# Altium PCB DDS.PcbDoc
Units mil, origin at the board's own origin, x right, y up, seen from the top; angles counter-clockwise.
Board outline 2755.91 x 2755.91 mil, 2 copper layers (Top Layer, Bottom Layer); 108 components, 69 nets, 448 pads, 150 vias.
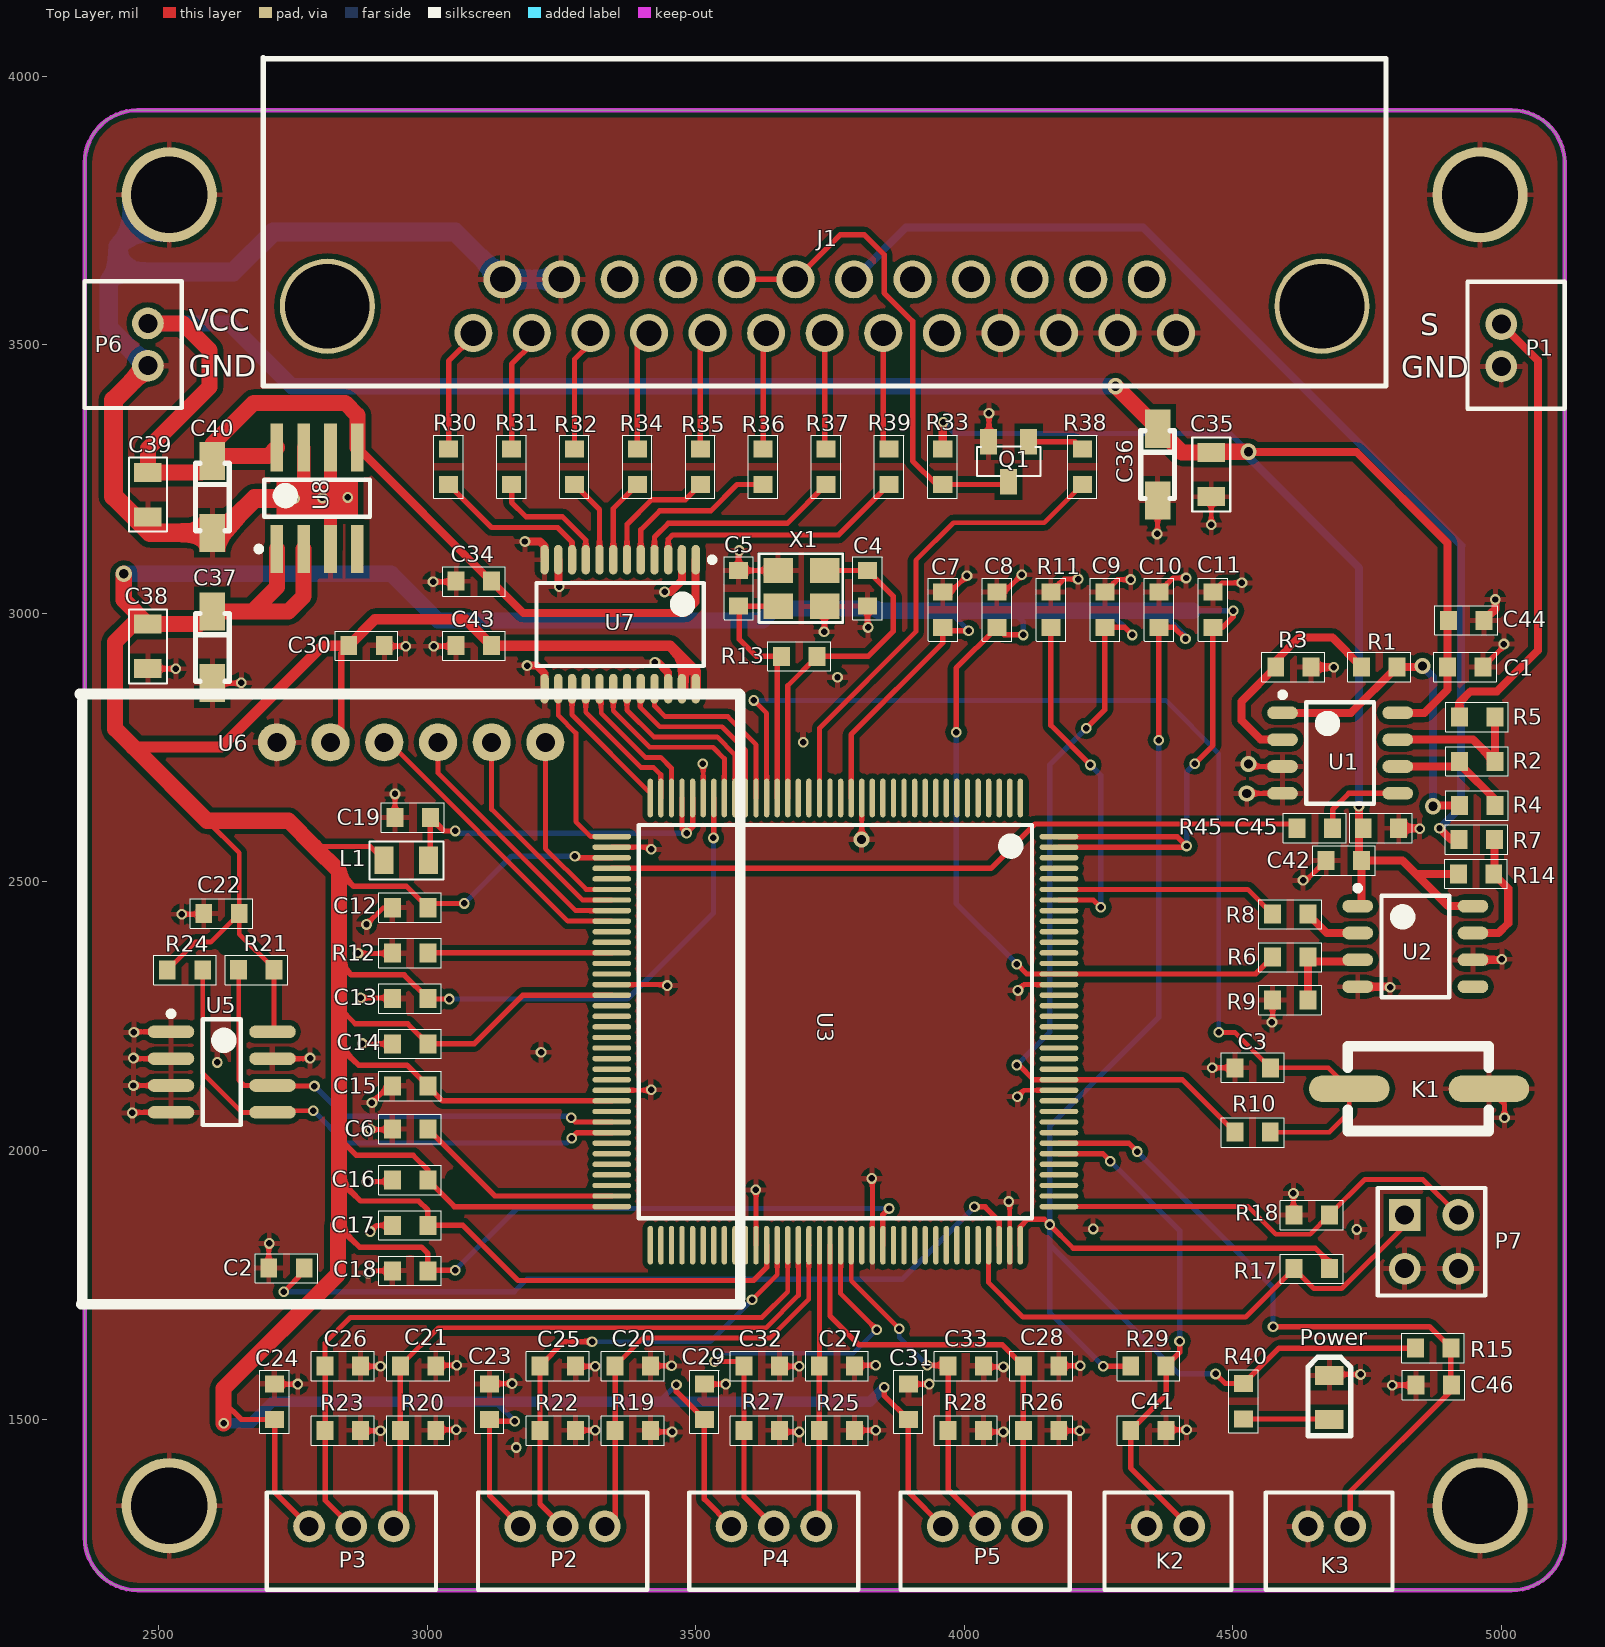
[diagram p0: Top Layer view]
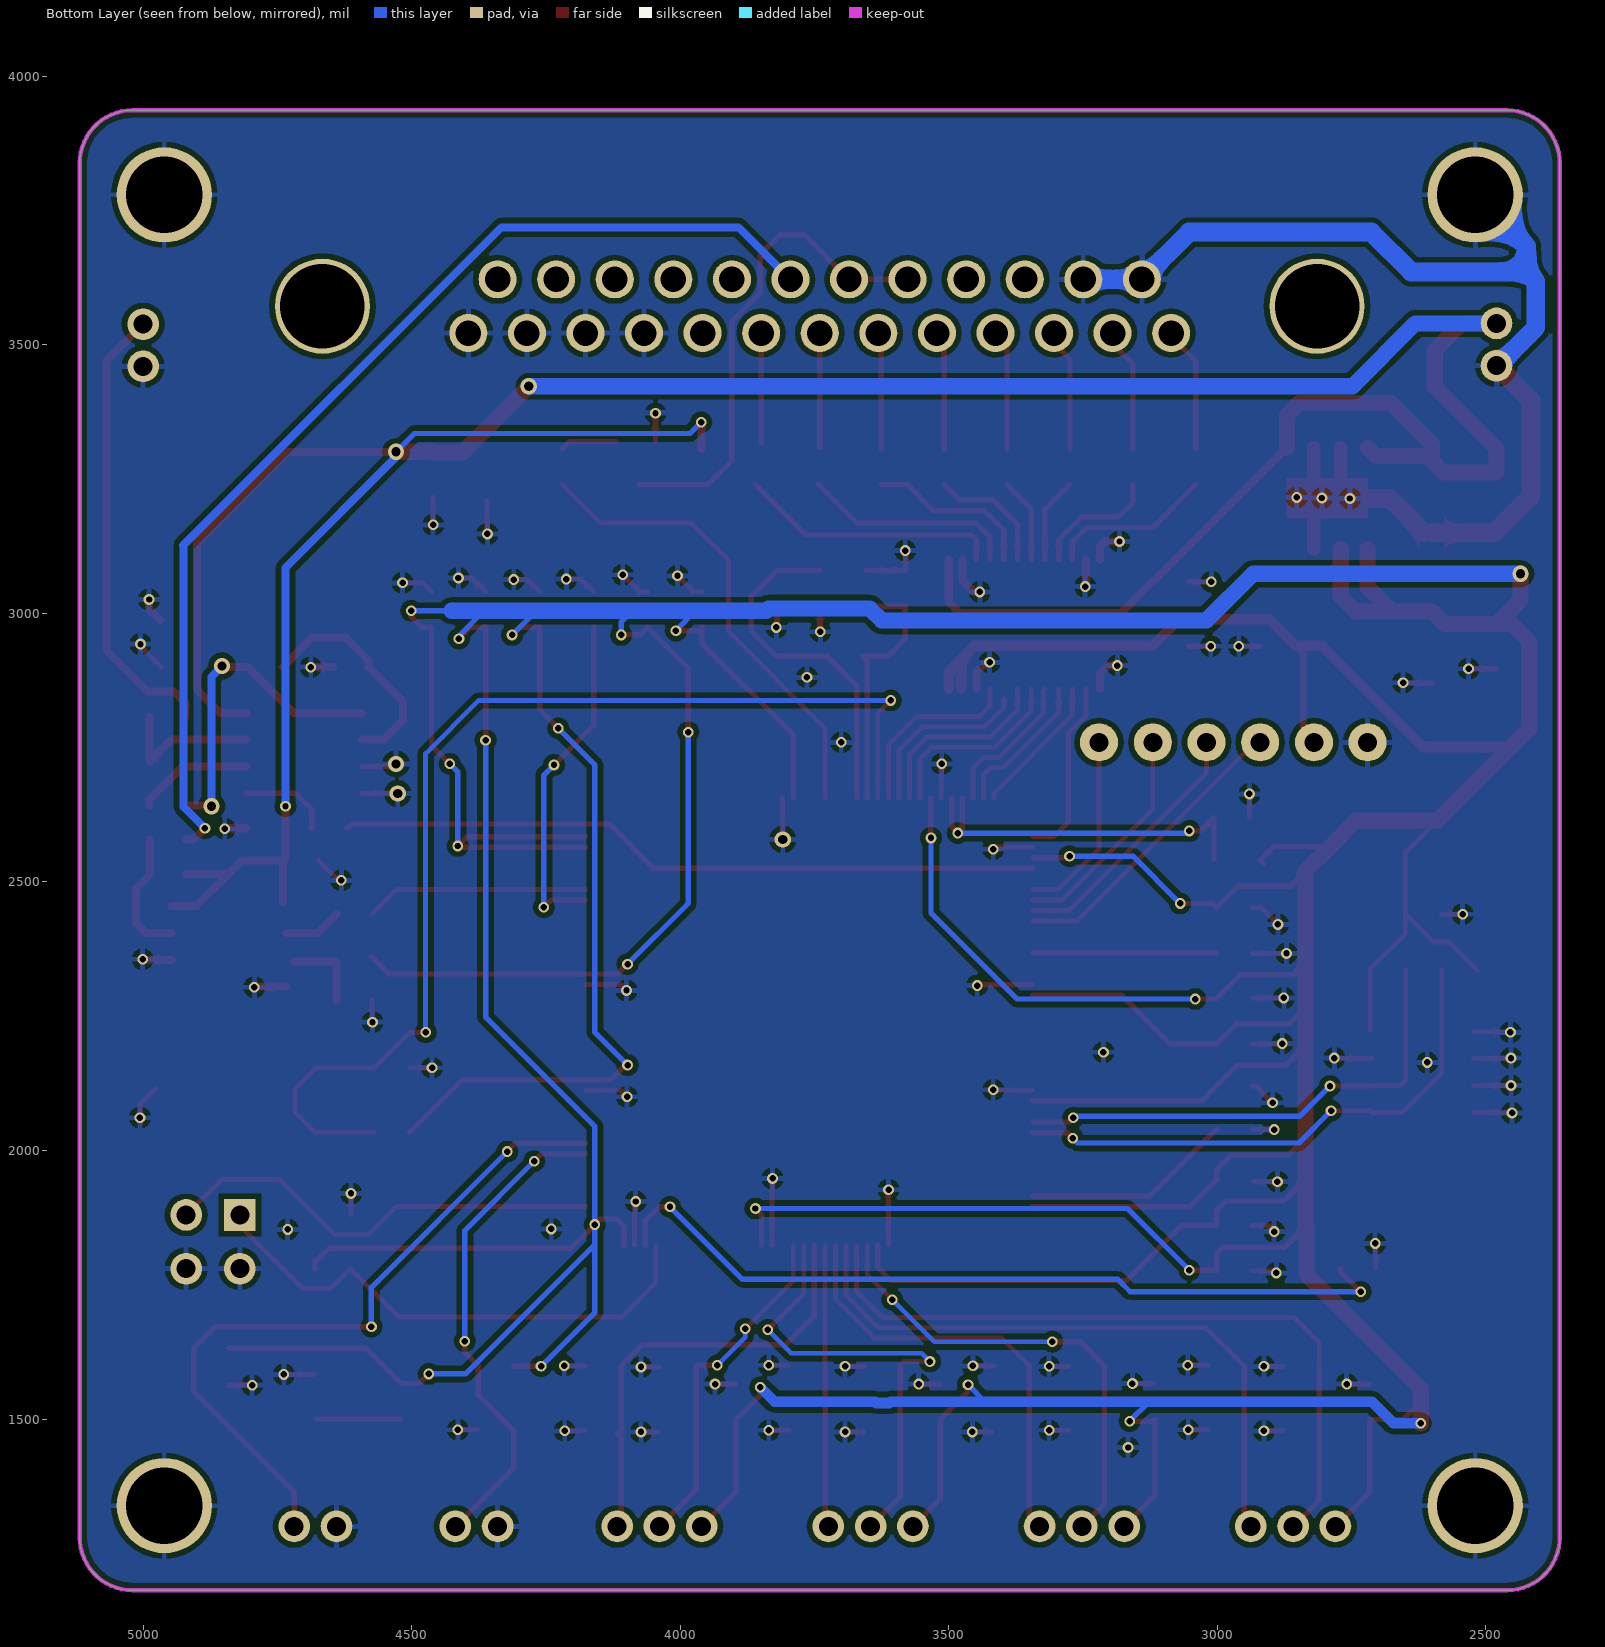
[diagram p1: Bottom Layer view, seen from below]

## Layer stack, top to bottom
Top Solder: solder mask 0.4, Solder Resist, Dk 3.5
Top Layer: signal copper 1.4
Dielectric1: dielectric 12.6, FR-4, Dk 4.8
Bottom Layer: signal copper 1.4
Bottom Solder: solder mask 0.4, Solder Resist, Dk 3.5

## Board outline
2362.2,1279.53 2362.2,3838.58 cw(c2460.63,3838.58) 2460.63,3937.01 5019.69,3937.01 cw(c5019.69,3838.58) 5118.11,3838.58 5118.11,1279.53 cw(c5019.69,1279.53) 5019.69,1181.1 2460.63,1181.1 cw(c2460.63,1279.53)

## Design rules (kind name [scope] priority, off if disabled: settings)
Clearance [All] p1: gap=8
ComponentClearance [All] p1: gap=0 collisioncheckmode=3 verticalgap=0 showdistances=FALSE
HoleSize [All] p1: absolutevalues=TRUE maxlimit=500 minlimit=1 maxpercent=80.000 minpercent=20.000
MinimumSolderMaskSliver [All] p1: minsoldermaskwidth=0
PolygonConnect [All] p1: connectstyle=Relief reliefconductorwidth=10 reliefentries=4 polygonreliefangle="90 Angle" airgapwidth=10
RoutingVias [All] p1: holewidth=12 width=20 viastyle="Through Hole" minholewidth=12 minwidth=20 maxholewidth=28 maxwidth=100
SilkToSilkClearance [All] p1: silktosilkclearance=0
SilkToSolderMaskClearance SilkscreenOverComponentPads [IsPad] p1: minsilkscreentomaskgap=0 clearancetoexposedcopper=TRUE
SolderMaskExpansion [All] p1: expansion=2
Width [All] p1: maxlimit=100 minlimit=8 preferedwidth=10
25 further rules are at their usual default settings.

## Classes and differential pairs
component class U_Power: C35 C36 C37 C38 C39 C40 LED1 P6 R40 U8
component class U_Module: C20 C21 C22 C23 C24 C25 C26 C27 C28 C29 C30 C31 C32 C33 C34 C41 C43 C46 J1 K2 K3 P2 P3 P4 P5 Q1 R15 R19 R20 R21 R22 R23 R24 R25 R26 R27 R28 R29 R30 R31 R32 R33 R34 R35 R36 R37 R38 R39 U5 U6 U7
component class U_MCU: C2 C3 C4 C5 C6 C7 C8 C9 C10 C11 C12 C13 C14 C15 C16 C17 C18 C19 K1 L1 P7 R10 R11 R12 R13 R17 R18 U3 X1
component class U_DDS: C1 C42 C44 C45 P1 R1 R2 R3 R4 R5 R6 R7 R8 R9 R14 R45 U1 U2

## Components (designator, comment, footprint, x,y, rotation, side; value= is the part's Value field where it differs from the comment)
C1 "Capacitor-0603" 0603 4900,2900 r0 top
C2 "Capacitor-0603" 0603 2771,1781 r180 top
C3 "Capacitor-0805" 0603 4504,2154 r0 top
C4 "Capacitor-0603" 0603 3820,3014.15 r90 top
C5 "Capacitor-0603" 0603 3580,3080 r270 top
C6 "Capacitor-0603" 0603 2935.15,2040 r0 top
C7 "Capacitor-0603" 0603 3960,3040 r270 top
C8 "Capacitor-0603" 0603 4060.6,3040 r270 top
C9 "Capacitor-0603" 0603 4261.8,3040 r270 top
C10 "Capacitor-0603" 0603 4362.4,3040 r270 top
C11 "Capacitor-0603" 0603 4463,3040 r270 top
C12 "Capacitor-0603" 0603 2935.15,2452 r0 top
C13 "Capacitor-0603" 0603 2935.15,2282.99 r0 top
C14 "Capacitor-0603" 0603 2935.15,2198.48 r0 top
C15 "Capacitor-0603" 0603 2935.15,2120 r0 top
C16 "Capacitor-0603" 0603 2935.15,1944.96 r0 top
C17 "Capacitor-0603" 0603 2935.15,1860.45 r0 top
C18 "Capacitor-0603" 0603 2935.15,1775.95 r0 top
C19 "Capacitor-0805" 0603 2940,2620 r0 top
C20 "Capacitor-0603" 0603 3416,1599 r180 top
C21 "Capacitor-0603" 0603 3016,1599 r180 top
C22 "Capacitor-0603" 0603 2584,2441 r0 top
C23 "Capacitor-0603" 0603 3116,1499 r90 top
C24 "Capacitor-0603" 0603 2716,1499 r90 top
C25 "Capacitor-0603" 0603 3276,1599 r180 top
C26 "Capacitor-0603" 0603 2876,1599 r180 top
C27 "Capacitor-0603" 0603 3796,1599 r180 top
C28 "Capacitor-0603" 0603 4176,1599 r180 top
C29 "Capacitor-0603" 0603 3516,1499 r90 top
C30 "Capacitor-0805" 0603 2920,2940 r180 top
C31 "Capacitor-0603" 0603 3896,1499 r90 top
C32 "Capacitor-0603" 0603 3656,1599 r180 top
C33 "Capacitor-0603" 0603 4036,1599 r180 top
C34 "Capacitor-0603" 0603 3120,3060 r180 top
C35 "Capacitor-0805" 0805 4460,3300 r270 top
C36 "电解电容" 钽电容1206（A3216） 4360,3340 r270 top
C37 "电解电容" 钽电容1206（A3216） 2600,3000 r270 top
C38 "Capacitor-0805" 0805 2480,2980 r270 top
C39 "Capacitor-0805" 0805 2480,3180 r90 top
C40 "电解电容" 钽电容1206（A3216） 2600,3280 r270 top
C41 "Capacitor-0603" 0603 4376,1479 r180 top
C42 "Capacitor-0603" 0603 4740,2540 r180 top
C43 "Capacitor-0603" 0603 3120,2940 r180 top
C44 "Capacitor-0603" 0603 4902,2987 r0 top
C45 "Capacitor-0603" 0603 4743,2600 r0 top
C46 "Capacitor-0603" 0603 4841,1563 r0 top
J1 "DB25" DB25ĸͷ 3739.16,3522.05 r180 top
K1 "按键" 贴片按键 4977,2115 r180 top
K2 "按键" 2MM接线端子 4340,1300 r0 top
K3 "按键" 2MM接线端子 4640,1300 r0 top
L1 "Inductor" 0805 2920,2540 r0 top
P1 "端子" 2MM接线端子 5000,3460 r90 top
P2 "端子3" 3MM接线端子 3173.33,1300 r0 top
P3 "端子3" 3MM接线端子 2780,1300 r0 top
P4 "端子3" 3MM接线端子 3566.67,1300 r0 top
P5 "端子3" 3MM接线端子 3960,1300 r0 top
P6 "端子" 2MM接线端子 2480,3540 r270 top
P7 "Header 2X2" HDR2X2 4820,1880 r270 top
Power "LED" LED-0805 4680,1540 r90 top (schematic designator LED1)
Q1 "BC847" BC847B 4120,3320 r270 top
R1 "Resistor-0603" 0603 4805.85,2900.56 r180 top
R2 "Resistor-0603" 0603 4922,2724.5 r0 top
R3 "Resistor-0603" 0603 4580,2900 r0 top
R4 "Resistor-0603" 0603 4922,2642 r0 top
R5 "Resistor-0603" 0603 4922,2807 r0 top
R6 "Resistor-0805" 0603 4640,2360 r180 top
R7 "Resistor-0603" 0603 4921,2579 r0 top
R8 "Resistor-0603" 0603 4640,2440 r180 top
R9 "Resistor-0805" 0603 4574.15,2280 r0 top
R10 "Resistor-0805" 0603 4569.85,2034 r180 top
R11 "Resistor-0805" 0603 4161.2,3040 r270 top
R12 "Resistor-0805" 0603 2935.15,2367.49 r0 top
R13 "Resistor-0603" 0603 3660,2920 r0 top
R14 "Resistor-0603" 0603 4920,2515 r0 top
R15 "Resistor-0603" 0603 4840,1632 r0 top
R17 "Resistor-0805" 0603 4680,1780 r180 top
R18 "Resistor-0805" 0603 4680,1880 r180 top
R19 "Resistor-0603" 0603 3416,1479 r180 top
R20 "Resistor-0603" 0603 3016,1479 r180 top
R21 "Resistor-0603" 0603 2715,2336.56 r180 top
R22 "Resistor-0603" 0603 3276,1479 r180 top
R23 "Resistor-0603" 0603 2876,1479 r180 top
R24 "Resistor-0603" 0603 2516,2336 r0 top
R25 "Resistor-0603" 0603 3796,1479 r180 top
R26 "Resistor-0603" 0603 4176,1479 r180 top
R27 "Resistor-0603" 0603 3656,1479 r180 top
R28 "Resistor-0603" 0603 4036,1479 r180 top
R29 "Resistor-0603" 0603 4376,1599 r180 top
R30 "Resistor-0603" 0603 3040,3240 r90 top
R31 "Resistor-0603" 0603 3157.14,3240 r90 top
R32 "Resistor-0603" 0603 3274.29,3240 r90 top
R33 "Resistor-0603" 0603 3960,3240 r90 top
R34 "Resistor-0603" 0603 3391.43,3240 r90 top
R35 "Resistor-0603" 0603 3508.57,3240 r90 top
R36 "Resistor-0603" 0603 3625.71,3240 r90 top
R37 "Resistor-0603" 0603 3742.86,3240 r90 top
R38 "Resistor-0603" 0603 4220,3240 r90 top
R39 "Resistor-0603" 0603 3860,3240 r90 top
R40 "Resistor-0603" 0603 4520,1500 r90 top
R45 "Resistor-0603" 0603 4620,2600 r0 top
U1 "AD8622" LM358-D 4700,2740 r0 top
U2 "MAX903" LM358-D 4840,2380 r0 top
U3 "STM32F407ZGT6" "Stm32f407ZET6 - duplicate" 3760,2240 r270 top
U5 "AT24C02" AT24C02 2524,2221 r0 top
U6 "OLED" OLED 2720,2760 r0 top
U7 "74LVC4245" 74LVC4245-PW 3500,3100 r270 top
U8 "LT1963" LT1963 2720,3120 r90 top
X1 "3225无源晶振" 3225无源晶振 3740,3080 r180 top

## Footprints (in the part's own frame and the unit in brackets; to place one, negate y for a bottom-side part, rotate by r counter-clockwise, add the part's x,y. Pads: shape width x height; smd on the part's side, far side on the other; paste and mask are expansions set on the pad)
2MM接线端子 [mm]
  round 1.5 hole 0.9: 1(0,0) 2(2,0)
  silkscreen extent -2,-3 4,1.6
3MM接线端子 [mm]
  round 1.5 hole 0.9: 1(0,0) 2(2,0) 3(4,0)
  silkscreen extent -2,-3 6,1.6
74LVC4245-PW [mm]
  oval 1.4x0.4 smd: 1(0,0) 2(0,-0.65) 3(0,-1.3) 4(0,-1.95) 5(0,-2.6) 6(0,-3.25) 7(0,-3.9) 8(0,-4.55) 9(0,-5.2) 10(0,-5.85) 11(0,-6.5) 12(0,-7.15) 13(6.1,-7.15) 14(6.1,-6.5) 15(6.1,-5.85) 16(6.1,-5.2) 17(6.1,-4.55) 18(6.1,-3.9) 19(6.1,-3.25) 20(6.1,-2.6) 21(6.1,-1.95) 22(6.1,-1.3) 23(6.1,-0.65) 24(6.1,0)
  silkscreen extent -0.12,-7.52 5.03,0.9, body extent 0.78,-7.53 5.28,0.37, height 1.25
0603 [mm] "0603"
  rect 0.8x0.9 smd: 1(0,0) 2(1.676,0)
  silkscreen extent -0.65,-0.69 2.32,0.7, body extent 0.1,-0.4 1.7,0.4, height 0.5
0805 [mm] "Chip Resistor, 2-Leads, Body 2.0x1.2mm, IPC Medium Density"
  rect 0.9x1.3 smd: 1(0,0) 2(2.1,0)
  silkscreen extent -0.7,-0.9 2.8,0.9, body extent 0.05,-0.6 2.05,0.6, height 0.5
3225无源晶振 [mm]
  rect 1.4x1.2 smd: 1(0,0) 2(2.2,0) 3(2.2,1.7) 4(0,1.7)
  silkscreen extent -0.86,-0.79 3.1,2.46
AT24C02 [mm]
  oval 2.2x0.6 smd: 1(-0.025,0) 2(-0.025,-1.27) 3(-0.025,-2.54) 4(-0.025,-3.81) 5(4.775,-3.81) 6(4.775,-2.54) 7(4.775,-1.27) 8(4.775,0)
  silkscreen extent -0.15,-4.41 3.27,0.97, body extent 0.38,-4.41 4.37,0.6, height 1.75
BC847B [mm] "SOT23, 3-Leads, Body 2.90x2.45mm, Pitch 0.95mm, IPC Medium Density"
  rect 1.2x0.8 smd: 1(0,-1.9) 2(0,0) 3(1.9,-0.95)
  silkscreen extent 0.24,-2.45 1.63,0.55, body extent 0.25,-2.45 1.65,0.55, height 1.1
DB25ĸͷ [mm]
  round 4.5 hole 4: 0(-23.545,-1.27) 0(23.495,-1.27)
  round 1.8 hole 1.2: 1(16.595,0) 2(13.825,0) 3(11.055,0) 4(8.285,0) 5(5.515,0) 6(2.745,0) 7(-0.025,0) 8(-2.795,0) 9(-5.565,0) 10(-8.335,0) 11(-11.105,0) 12(-13.875,0) 13(-16.645,0) 14(15.21,-2.54) 15(12.44,-2.54) 16(9.67,-2.54) 17(6.9,-2.54) 18(4.13,-2.54) 19(1.36,-2.54) 20(-1.41,-2.54) 21(-4.18,-2.54) 22(-6.95,-2.54) 23(-9.72,-2.54) 24(-12.49,-2.54) 25(-15.26,-2.54)
  silkscreen extent -26.58,-13.02 26.52,2.5
HDR2X2 [mm] "Connector; Header; 2x2 Position"
  rect 1.5x1.5 hole 0.9: 1(0,0)
  round 1.5 hole 0.9: 2(0,2.54) 3(2.54,0) 4(2.54,2.54)
  silkscreen extent -1.27,-1.27 3.81,3.81
LED-0805 [mm]
  rect 0.9x1.35 smd: 1(-1.05,0) 2(1.05,0)
  silkscreen extent -1.8,-1.02 1.91,1.02
LM358-D [mm] "SOIC, 8-Leads, Body 4.90x3.90mm, Pitch 1.27mm, IPC Medium Density"
  oval 1.45x0.6 smd: 1(-2.725,1.905) 2(-2.725,0.635) 3(-2.725,-0.635) 4(-2.725,-1.905) 5(2.725,-1.905) 6(2.725,-0.635) 7(2.725,0.635) 8(2.725,1.905)
  silkscreen extent -2.85,-2.4 1.6,2.88, body extent -2,-2.4 2,2.4, height 1.75
LT1963 [mm]
  rect 2.25x0.6 smd: 1(0,0) 2(0,-1.27) 3(0,-2.54) 4(0,-3.81) 5(4.8,-3.81) 6(4.8,-2.54) 7(4.8,-1.27) 8(4.8,0)
  silkscreen extent -0.12,-4.41 3.27,0.97, body extent 0.41,-4.41 4.4,0.6, height 1.75
OLED [mm]
  round 1.8 hole 0.9: 1(0,0) 2(2.54,0) 3(5.08,0) 4(7.62,0) 5(10.16,0) 6(12.7,0)
  round 0 smd: 7(-6.172,-23.495) 8(18.872,-23.495)
  silkscreen extent -9.32,-26.57 21.95,2.29
"Stm32f407ZET6 - duplicate" [mm] "TSQFP, 144-Leads, Body 22.2x22.2mm (max), Pitch 0.50mm, IPC Medium Density"
  oval 1.83x0.254 smd: 1(-10.575,8.75) 2(-10.575,8.25) 3(-10.575,7.75) 4(-10.575,7.25) 5(-10.575,6.75) 6(-10.575,6.25) 7(-10.575,5.75) 8(-10.575,5.25) 9(-10.575,4.75) 10(-10.575,4.25) 11(-10.575,3.75) 12(-10.575,3.25) 13(-10.575,2.75) 14(-10.575,2.25) 15(-10.575,1.75) 16(-10.575,1.25) 17(-10.575,0.75) 18(-10.575,0.25) 19(-10.575,-0.25) 20(-10.575,-0.75) 21(-10.575,-1.25) 22(-10.575,-1.75) 23(-10.575,-2.25) 24(-10.575,-2.75) 25(-10.575,-3.25) 26(-10.575,-3.75) 27(-10.575,-4.25) 28(-10.575,-4.75) 29(-10.575,-5.25) 30(-10.575,-5.75) 31(-10.575,-6.25) 32(-10.575,-6.75) 33(-10.575,-7.25) 34(-10.575,-7.75) 35(-10.575,-8.25) 36(-10.575,-8.75) 73(10.575,-8.75) 74(10.575,-8.25) 75(10.575,-7.75) 76(10.575,-7.25) 77(10.575,-6.75) 78(10.575,-6.25) 79(10.575,-5.75) 80(10.575,-5.25) 81(10.575,-4.75) 82(10.575,-4.25) 83(10.575,-3.75) 84(10.575,-3.25) 85(10.575,-2.75) 86(10.575,-2.25) 87(10.575,-1.75) 88(10.575,-1.25) 89(10.575,-0.75) 90(10.575,-0.25) 91(10.575,0.25) 92(10.575,0.75) 93(10.575,1.25) 94(10.575,1.75) 95(10.575,2.25) 96(10.575,2.75) 97(10.575,3.25) 98(10.575,3.75) 99(10.575,4.25) 100(10.575,4.75) 101(10.575,5.25) 102(10.575,5.75) 103(10.575,6.25) 104(10.575,6.75) 105(10.575,7.25) 106(10.575,7.75) 107(10.575,8.25) 108(10.575,8.75)
  oval 0.254x1.83 smd: 37(-8.75,-10.575) 38(-8.25,-10.575) 39(-7.75,-10.575) 40(-7.25,-10.575) 41(-6.75,-10.575) 42(-6.25,-10.575) 43(-5.75,-10.575) 44(-5.25,-10.575) 45(-4.75,-10.575) 46(-4.25,-10.575) 47(-3.75,-10.575) 48(-3.25,-10.575) 49(-2.75,-10.575) 50(-2.25,-10.575) 51(-1.75,-10.575) 52(-1.25,-10.575) 53(-0.75,-10.575) 54(-0.25,-10.575) 55(0.25,-10.575) 56(0.75,-10.575) 57(1.25,-10.575) 58(1.75,-10.575) 59(2.25,-10.575) 60(2.75,-10.575) 61(3.25,-10.575) 62(3.75,-10.575) 63(4.25,-10.575) 64(4.75,-10.575) 65(5.25,-10.575) 66(5.75,-10.575) 67(6.25,-10.575) 68(6.75,-10.575) 69(7.25,-10.575) 70(7.75,-10.575) 71(8.25,-10.575) 72(8.75,-10.575) 109(8.75,10.575) 110(8.25,10.575) 111(7.75,10.575) 112(7.25,10.575) 113(6.75,10.575) 114(6.25,10.575) 115(5.75,10.575) 116(5.25,10.575) 117(4.75,10.575) 118(4.25,10.575) 119(3.75,10.575) 120(3.25,10.575) 121(2.75,10.575) 122(2.25,10.575) 123(1.75,10.575) 124(1.25,10.575) 125(0.75,10.575) 126(0.25,10.575) 127(-0.25,10.575) 128(-0.75,10.575) 129(-1.25,10.575) 130(-1.75,10.575) 131(-2.25,10.575) 132(-2.75,10.575) 133(-3.25,10.575) 134(-3.75,10.575) 135(-4.25,10.575) 136(-4.75,10.575) 137(-5.25,10.575) 138(-5.75,10.575) 139(-6.25,10.575) 140(-6.75,10.575) 141(-7.25,10.575) 142(-7.75,10.575) 143(-8.25,10.575) 144(-8.75,10.575)
  silkscreen extent -9.3,-9.3 9.3,9.3, body extent -10,-10 10,10, height 0.16
贴片按键 [mil]
  oval 150x50 smd: 1(0,0) 2(260,0)
  silkscreen extent 0,-79 263,79
钽电容1206（A3216） [mm]
  rect 1.8x1.2 smd: 1(3.3,0) 2(-0.1,0)
  silkscreen extent 0,-0.8 3.2,0.8

## Part data
C3 C30: library part Capacitor-0
C19 C35 C38 C39: library part Capacitor
L1: library part Ind
P7: "Header, 2-Pin, Dual row"
R6 R9 R10 R11 R12 R17 R18: library part Resistor-0
U3: library part STM32F407ZET6
U6: library part O
U8: library part L

## Free pads (board coordinates)
  round 177.17 hole 141.73: 0(2519.68,1338.58) 0(2519.68,3779.53) 0(4960.63,1338.58) 0(4960.63,3779.53)

## Via types
v1: diameter 20, hole 12, Top Layer to Bottom Layer, 142 vias
v2: diameter 30, hole 17, Top Layer to Bottom Layer, 8 vias

## Nets (pads, with @x,y where several pads share a name; then routed paths per layer and width w, separated by ;. In a path a pad name is that pad's centre, name@x,y a point inside that pad or via, vN(x,y) a via of type N, cw(c..) or ccw(c..) an arc to the next point about the centre after c; other vN are vias at no path point)
A1: C21.2 P3.3 R20.2 U3.87 | length 1175.4
  Top Layer w9: C21.2 3021,1670 3631,1670 3691.1,1730.1 U3.87
  Top Layer w10: P3.3@2950,1312.52 R20.2 C21.2
A2: C20.2 P2.3 R19.2 U3.88 | length 819.8
  Top Layer w9: C20.2 3402,1651 3638.87,1651 3710.6,1722.73 3710.6,1823.48 U3.88
  Top Layer w10: P2.3 3350,1319.19 R19.2 C20.2
A3: C27.2 P4.3 R25.2 U3.89 | length 525.6
  Top Layer w9: C27.2@3730.47,1599.47 U3.89
  Top Layer w10: P4.3 3730,1305.85 R25.2 C27.2
A4: C28.2 P5.3 R26.2 U3.90 | length 832.2
  Top Layer w10: U3.90 3750.16,1691.84 3804,1638 4071,1638 C28.2 R26.2 ; P5.3@4110,1307.48 R26.2 ; R26.2@4117.48,1471.52 R26.2
B1: C26.2 P3.2 R23.2 U3.86 | length 1349.4
  Top Layer w9: C26.2 2810,1642 2857,1689 3623.13,1689 3671.42,1737.29 U3.86
  Top Layer w10: C26.2 R23.2 2810,1348.74 P3.2
B2: C25.2 P2.2 R22.2 U3.85 | length 883.4
  Top Layer w9: v1(3605,1722) 3651.73,1768.73 U3.85
  Top Layer w10: P2.2 3210,1342.07 R22.2 C25.2 3255,1644 v1(3307,1644)
  Bottom Layer w9: v1(3307,1644) 3527,1644 v1(3605,1722)
B3: C32.2 P4.2 R27.2 U3.91 | length 882.9
  Top Layer w9: U3.91 3769.84,1733.16 v1(3837,1666)
  Top Layer w10: v1(3535,1607) C32.2@3583,1607 ; C32.2@3590,1600 C32.2 R27.2 3590,1355.41 P4.2
  Bottom Layer w9: v1(3535,1607) 3550.5,1622.5 3793.5,1622.5 v1(3837,1666)
B4: C33.2 P5.2 R28.2 U3.92 | length 649.1
  Top Layer w9: U3.92 3789.53,1757.47 v1(3879,1668)
  Top Layer w10: v1(3931,1600) 3969,1600 C33.2 R28.2 3970,1368.74 P5.2
  Bottom Layer w9: v1(3879,1668) 3879,1652 v1(3931,1600)
BOOT0: R11.2 U3.138 | length 642.6
  Top Layer w9: U3.138 4240.62,2466.38 v1(4254,2453)
  Top Layer w10: R11.2 4161.2,2791.8 v1(4235,2718)
  Bottom Layer w10: v1(4235,2718) 4254,2699 v1(4254,2453)
BOOT1: R12.2 U3.48 | length 342.7
  Top Layer w10: R12.2 3001.61,2367.95 U3.48
DDS: R2.2 R5.2 U1.7 | length 280
  Top Layer w15: U1.7 4947.5,2765 R2.2 R5.2
GND: C1.2 C2.2 C3.1 C4.1 C5.1 C6.1 C7.1 C8.1 C9.1 C10.1 C11.1 C12.1 C13.1 C14.1 C15.1 C16.1 C17.1 C18.1 C19.1 C20.1 C21.1 C22.1 C23.2 C24.2 C25.1 C26.1 C27.1 C28.1 C29.2 C30.1 C31.2 C32.1 C33.1 C34.2 C35.2 C36.1 C37.1 C38.2 C39.1 C40.1 C41.1 C42.2 C43.2 C44.2 C45.2 C46.1 J1.10 J1.11 J1.12 J1.13 J1.14 J1.15 K1.1 K2.1 K3.1 P1.1 P6.2 P7.3 P7.4 pad.0 Power.2 Q1.1 R3.2 R9.1 R11.1 R12.1 R18.2 R19.1 R20.1 R22.1 R23.1 R25.1 R26.1 R27.1 R28.1 U1.3 U1.4 U2.4 U2.6 U3.16 U3.31 U3.38 U3.51 U3.61 U3.83 U3.94 U3.107 U3.120 U3.130 U5.1 U5.2 U5.3 U5.4 U5.7 U6.1 U7.2 U7.11 U7.12 U7.13 U7.22 U8.3 U8.6 U8.7 X1.2 X1.4 | length 6906.7
  Top Layer w9: v1@2452,2071 U5.4 ; v1(2453,2121) U5.3 ; v1@2454,2171 U5.2 ; v1@2455,2221 U5.1 ; v1(2543,2440) C22.1@2583,2440 ; C2.2 2705,1826 v1(2706,1827) ; U5.7 v1@2781,2171 ; C24.2 v1(2759,1565) ; v1(2871,2367) 2934.66,2367 R12.1 ; v1(2876,2284) C13.1@2934.14,2284 ; R23.1@2877,1478 v1(2913,1478) ; C26.1@2877,1598 v1(2913,1598) ; v1@2879.52,2198.48 C14.1 ; v1(2887,2421) 2918,2452 C12.1 ; v1(2888,1942) C16.1@2932.19,1942 ; v1(2890,1772) 2893.95,1775.95 C18.1 ; v1(2894,1849) 2905.45,1860.45 C17.1 ; v1(2894,2039) 2934.15,2039 C6.1 ; v1(2897,2089) 2928,2120 C15.1 ; C19.1 v1(2940,2664) ; R20.1@3017,1480 v1(3054,1480) ; C21.1@3017,1600 v1(3055,1600) ; C23.2@3117,1566 v1(3158,1566) ; R22.1 v1(3313,1479) ; C25.1@3277,1598 v1(3313,1598) ; U3.61 v1@3416.05,2112.05 ; U3.51 v1@3445.1,2308.9 ; U3.38 3413.2,2564.8 v1(3417,2561) ; C20.1 v1(3455,1599) ; R19.1@3419,1476 v1(3456,1476) ; v1(3513,2720) 3513.94,2719.06 U3.31 ; C29.2 v1(3556,1565) ; U3.83 v1@3612.36,1927 ; C32.1@3657,1598 v1(3693,1598) ; R27.1@3659,1476 v1(3693,1476) ; R25.1 v1(3835,1479) ; C27.1@3797,1600 v1(3835,1600) ; v2(3809,2579) 3809.21,2579.21 U3.16 ; U3.94 v1@3828.9,1948 ; C31.2 v1(3935,1565) ; C7.1 3975,3040 v1(4005,3070) ; C33.1@4038,1597 v1(4073,1597) ; R28.1@4039,1476 v1(4073,1476) ; C8.1 4075,3040 v1(4107,3072) ; v1(4083,1905) 4084.8,1903.2 U3.107 ; v1(4099,2100) 4111.05,2112.05 U3.120 ; v1(4100,2298) 4110.9,2308.9 U3.130 ; R11.1 4185.2,3064 v1(4212,3064) ; C28.1 v1(4216,1599) ; R26.1@4177,1478 v1(4215,1478) ; C9.1 4284.8,3063 v1(4310,3063) ; v1(4359,3148) 4360,3149 C36.1 ; C10.1 4388.4,3066 v1(4413,3066) ; C41.1@4377,1480 v1(4414,1480) ; v1(4460,3165) C35.2 ; v1(4462,2154) C3.1 ; C11.1 4480,3057 v1(4517,3057) ; v2(4526,2665) U1.4 ; v2@4534,2715 U1.3 ; v1@4574.15,2240.15 R9.1 ; R18.2@4613,1881 v1(4613,1920) ; v1(4631,2503) 4637,2503 C42.2 ; Power.2@4681.66,1583 v1(4738,1583) ; C1.2 5005,2939 v1(5005,2943) ; K1.1 5006,2086 v1(5006,2061)
  Top Layer w10: C38.2@2480.32,2897 v1(2532,2897) ; C37.1 v1@2653.08,2870.08 ; C30.1@2921,2939 v1(2960,2939) ; v1(3011,3059) C34.2@3053,3059 ; v1(3012,2939) C43.2@3053,2939 ; v1@3244.09,3051.91 v1(3246,3050) ; v1@3580,3116 C5.1 X1.2 ; v1(3739,2966) 3740,2967 X1.4 ; C4.1 3820,2975 v1(3821,2974) ; Q1.1@4046,3320.8 v1(4046,3373) ; K2.1@4340,1276 K2.1 ; v1(4797,1563) C46.1
  Top Layer w15: v1(3182,3134) 3210,3134 3218.5,3125.5 U7.12 ; v1(3186,2903) 3204,2903 3218.5,2888.5 U7.13 ; v1@3244.09,3051.91 U7.11 ; v1(3424,2909) 3429.64,2909 3448.6,2890.04 3448.6,2860.06 U7.22 ; v1(3442,3040) 3453,3040 3474.41,3061.41 U7.2 ; R3.2 v1(4688,2900) ; U2.4 v1@4792,2305 ; C45.2 4847,2600 v1(4848,2599) ; U2.6 v1@5000,2355 ; C44.2 4989,3008 v1(4989,3026)
  Top Layer w25: C40.1 C40.1@2615.08,3150.08 ; U8.7 2770,3228 2781,3217 ; U8.3 2820,3219 ; U8.6 2820,3219 ; 2821,3218 2820,3219
  Top Layer w35: P6.2 2416,3397.26 2416,3218 2483.92,3150.08 C40.1 ; C40.1@2615.08,3150.08 2679,3214 v1(2753,3214)
  Bottom Layer w35: P6.2 2478.09,3461.26 2407,3532.35 2407,3619 2424,3636 ; pad.0@2519.68,3779.53 2424,3683.84 2424,3636 ; J1.15 J1.14 3052.4,3710 2713,3710 2639,3636 2424,3636
  other v1: 3166,1447 4731,1853 4240,1854 3612,1927 3828,1948 2451,2070 3417,2113 2609,2164 2453,2172 2782,2172 3212,2183 2879,2199 2454,2220 4573,2239 4793,2304 3447,2307 5001,2356 3700,2760 2654,2871 3764,2881 3581,3117 2805,3215 2852,3216
  other v2: 4529,2720
NetC2_1: C2.1 U3.106 | length 1513.3
  Top Layer w10: v1(2733,1737) 2771,1775 C2.1 ; v1(4019,1895) 4039,1895 4065.12,1868.88 U3.106
  Bottom Layer w10: v1(2733,1737) 3162,1737 3185,1760 3884,1760 v1(4019,1895)
NetC4_2: C4.2 R13.2 U3.23 X1.1 | length 660.5
  Top Layer w10: U3.23 3671.42,2865.42 R13.2 3821,2920 3868,2967 3868,3031.85 3819.85,3080 X1.1
NetC5_2: C5.2 R13.1 U3.24 X1.3 | length 492.9
  Top Layer w10: U3.24 3651.73,2911.73 R13.1 3613,2920 3580.93,2952.07 3580.93,3013.07 X1.3
NetC6_2: C6.2 U3.71 | length 394.2
  Top Layer w10: C6.2 3125.95,1915.2 U3.71
NetC41_2: C41.2 K2.2 R29.1 U3.114 | length 917.6
  Top Layer w10: U3.114 4258.06,1993.94 v1(4272,1980) ; v1(4401,1645) 4401,1624 R29.1 4376,1545 C41.2 4310,1408.74 K2.2
  Bottom Layer w10: v1(4272,1980) 4401,1851 v1(4401,1645)
NetC46_2: C46.2 K3.2 R15.2 U3.115 | length 1340.9
  Top Layer w10: U3.115 4306.38,2013.62 v1(4322,1998) ; v1(4575,1672) 4866,1672 R15.2 4906,1564 C46.2 4907,1553 4718.74,1364.74 K3.2
  Bottom Layer w10: v1(4322,1998) 4575,1745 v1(4575,1672)
NetJ1_1: J1.1 R30.2 | length 235
  Top Layer w10: R30.2 3040,3470 3085.83,3515.83 J1.1
NetJ1_2: J1.2 R31.2 | length 231.7
  Top Layer w10: R31.2 3157.14,3464.14 3194.88,3501.88 J1.2
NetJ1_3: J1.3 R32.2 | length 228.3
  Top Layer w10: R32.2 3274.29,3473.29 3303.94,3502.94 J1.3
NetJ1_4: J1.4 R34.2 | length 225
  Top Layer w10: R34.2 3391.43,3500.48 J1.4
NetJ1_5: J1.5 R35.2 | length 221.6
  Top Layer w10: R35.2 3508.57,3508.57 J1.5
NetJ1_6: J1.6 R36.2 | length 218.3
  Top Layer w10: R36.2 3625.71,3496.71 3631.1,3502.1 J1.6
NetJ1_7: J1.7 R37.2 | length 213.3
  Top Layer w10: R37.2@3740.16,3308.7 J1.7
NetJ1_8: J1.8 R39.2 | length 205.3
  Top Layer w10: R39.2@3849.21,3316.79 J1.8
NetJ1_18: J1.18 J1.19 Q1.3 R33.1 | length 921.7
  Top Layer w10: J1.18 J1.19 3768.58,3705 3814,3705 3851,3668 3851,3597 3904,3544 3904,3284 3948,3240 R33.1 Q1.3@4077.4,3240
NetJ1_20: J1.20 R7.1 | length 2003.7
  Top Layer w15: v1(4885,2600) 4906,2579 R7.1
  Bottom Layer w15: J1.20 3891.64,3719 4333,3719 4925.5,3126.5 ; v1(4885,2600) 4925,2640 4925,3126
NetLED1_1: Power.1 R40.1 | length 158.7
  Top Layer w9: R40.1 Power.1@4678.66,1500
NetP1_2: P1.2 R5.1 | length 849.1
  Top Layer w15: R5.1 4922,2834 4943,2855 4992,2855 5068,2931 5068,3470.74 P1.2
NetQ1_2: Q1.2 R38.2 | length 105.8
  Top Layer w10: Q1.2 4206,3320 R38.2
NetR1_1: R1.1 R4.1 U1.1 | length 615
  Top Layer w15: U1.1 4720.29,2815 R1.1 4851.56,2900.56 v2(4853,2902) ; v2(4873,2641) 4874,2642 R4.1
  Bottom Layer w15: v2(4853,2902) 4873,2882 v2(4873,2641)
NetR1_2: R1.2 R3.1 U1.2 | length 429.3
  Top Layer w15: U1.2 4552,2765 4516,2801 4516,2836 R3.1 4580,2912 4623,2955 4685.41,2955 R1.2
NetR2_1: R2.1 R4.2 U1.6 | length 218
  Top Layer w15: U1.6 4927,2715 4988,2654 R4.2
NetR6_1: R6.1 R9.2 U2.3 | length 151.6
  Top Layer w15: R9.2@4640,2280.15 4640,2352 U2.3@4719.72,2352
NetR7_2: R7.2 R14.2 U2.7 | length 240.8
  Top Layer w15: U2.7 4995,2405 5013,2423 5013,2488 R14.2 4987,2516 R7.2
NetR8_1: R8.1 U2.2 | length 107.2
  Top Layer w15: R8.1 4675,2405 U2.2
NetR8_2: R8.2 U3.139 | length 416.7
  Top Layer w9: U3.139 4527.94,2486.06 R8.2
NetR21_2: R21.2 U3.64 U5.6 | length 931.1
  Top Layer w9: R21.2 2649,2131 2659,2121 U5.6
  Top Layer w10: U5.6@2712.98,2120 v1(2790,2120) ; v1(3268,2061) 3276.01,2052.99 U3.64
  Bottom Layer w10: v1(2790,2120) 2846,2064 3265,2064 v1(3268,2061)
NetR24_2: R24.2 U3.65 U5.5 | length 1018
  Top Layer w9: R24.2 2582,2144 2655,2071 U5.5 2714.98,2074 v1(2788,2074)
  Top Layer w10: v1(3269,2023) 3279.31,2033.31 U3.65
  Bottom Layer w10: v1(2788,2074) 2848,2014 3260,2014 v1(3269,2023)
NetR30_1: R30.1 U7.10 | length 307.2
  Top Layer w10: R30.1 3120,3160 3243,3160 3269.68,3133.32 U7.10
NetR31_1: R31.1 U7.9 | length 237
  Top Layer w10: R31.1 3157.14,3206.86 3184,3180 3252,3180 3295.28,3136.72 U7.9
NetR32_1: R32.1 U7.8 | length 159.3
  Top Layer w10: R32.1 3320.87,3193.42 U7.8
NetR34_1: R34.1 U7.7 | length 158.6
  Top Layer w10: U7.7 3346.46,3195.03 R34.1
NetR35_1: R35.1 U7.6 | length 233.1
  Top Layer w10: U7.6 3372.05,3165.94 3418.11,3212 3480.57,3212 R35.1
NetR36_1: R36.1 U7.5 | length 318.7
  Top Layer w10: U7.5 3397.64,3155.64 3433,3191 3528,3191 3577,3240 R36.1
NetR37_1: R37.1 U7.4 | length 402.4
  Top Layer w10: U7.4 3423.23,3142.23 3449,3168 3670.86,3168 R37.1
NetR38_1: R38.1 U3.20 | length 885.4
  Top Layer w9: U3.20 3730.47,2786.47 3910,2966 3910,3099 3980,3169 4149,3169 R38.1
NetR39_1: R39.1 U7.3 | length 491.3
  Top Layer w10: U7.3 3448.82,3137.82 3457,3146 3766,3146 R39.1
NetR45_1: R45.1 U3.40 | length 1313.9
  Top Layer w10: U3.40 4049.43,2525.43 4132,2608 4612,2608 R45.1
NetR45_2: R45.2 U1.5 | length 168.7
  Top Layer w10: R45.2 4686,2635 4716,2665 U1.5
NetU3_26: U3.26 U7.21 | length 350.4
  Top Layer w9: U7.21 3423.23,2827.77 3443,2808 3560,2808 3612.36,2755.64 U3.26
NetU3_27: U3.27 U7.20 | length 333.7
  Top Layer w9: U7.20@3397,2841 3397,2825 3433,2789 3549,2789 3592.68,2745.32 U3.27
NetU3_28: U3.28 U7.19 | length 355.9
  Top Layer w9: U7.19 3372.05,2819.95 3422,2770 3540,2770 3572.99,2737.01 U3.28
NetU3_29: U3.29 U7.18 | length 358.3
  Top Layer w9: U7.18 3346.46,2818.67 3414.13,2751 3532.13,2751 3553.31,2729.82 U3.29
NetU3_34: U3.34 U7.17 | length 275.9
  Top Layer w9: U7.17 3324.08,2856.63 3324.08,2814.18 3406.26,2732 3435,2732 3454.88,2712.12 U3.34
NetU3_35: U3.35 U7.16 | length 275.3
  Top Layer w9: U7.16 3295.28,2816.11 3398.39,2713 3422,2713 3435.2,2699.8 U3.35
NetU3_36: U3.36 U7.15 | length 263.9
  Top Layer w9: U7.15 3269.68,2811.32 3415.51,2665.49 U3.36
NetU3_37: U3.37 U7.14 | length 339.5
  Top Layer w9: U7.14 3244.09,2810.04 3277,2777.13 3277,2612 3304.51,2584.49 U3.37
NetU3_42: U3.42 U6.6 | length 353.1
  Top Layer w9: U6.6 3220,2562 3295.94,2486.06 U3.42
NetU3_43: U3.43 U6.5 | length 418.4
  Top Layer w9: U6.5 3120,2635.13 3288.57,2466.56 3343.48,2466.56 U3.43
NetU3_44: U3.44 U6.4 | length 486.8
  Top Layer w9: U6.4 3020,2703 3276.31,2446.69 U3.44
NetU3_45: U3.45 U6.3 | length 561.6
  Top Layer w9: U6.3 2929,2760 3261.99,2427.01 U3.45
RESET: C3.2 K1.2 R10.1 U3.25 | length 2110.6
  Top Layer w9: v1(3608,2838) 3632.05,2813.95 U3.25 ; v1(4474,2220) 4504,2220 C3.2 4678,2154 K1.2 4717,2071 4680,2034 R10.1
  Bottom Layer w9: v1(3608,2838) 4375,2838 4474,2739 v1(4474,2220)
TCK: P7.2 R18.1 U3.109 | length 834.6
  Top Layer w9: U3.109 4528.49,1895.51 4580,1844 4644,1844 R18.1 4746,1946 4854,1946 P7.2
TMS: P7.1 R17.2 U3.105 | length 992.1
  Top Layer w9: U3.105 4045.43,1753.57 4109,1690 4524,1690 R17.2 4651,1743 4703,1743 4820,1860 P7.1
VCC-5: C1.1 C34.1 C35.1 C36.2 C39.2 C40.2 C42.1 C44.1 C45.1 P6.1 R14.1 R33.2 U1.8 U2.1 U2.8 U7.1 U8.5 U8.8 | length 6779.8
  Top Layer w15: U8.5 3118.98,3060 C34.1 3179,3001 3480,3001 3500,3021 U7.1 ; R33.2 3960,3355 v1(3961,3356) ; v2(4529,3301) 4730,3301 4900,3131 C1.1 4900,2858 4857,2815 U1.8 ; v1(4735,2641) 4735,2545 C42.1 ; U2.1@4740,2462.28 C42.1 ; R14.1 4841,2515 ; U2.8 4901,2455 4841,2515 ; C42.1 4816,2540 4841,2515
  Top Layer w30: P6.1 2545,3540 2595,3490 2595,3422 2480,3307 C39.2 2578.74,3262.68 C40.2 ; U8.8 2704.02,3293 2609.06,3293 C40.2 ; U8.5 2870,3369 2847,3392 2677,3392 2600,3315 C40.2 ; v2(4282,3423) 4405,3300 C35.1 4461,3301 v2(4529,3301)
  Bottom Layer w10: v1(3961,3356) 3982,3335 4495,3335 v2(4529,3301)
  Bottom Layer w15: v2(4529,3301) 4529,3291 4735,3085 v1(4735,2641)
  Bottom Layer w30: P6.1 2631,3540 2748,3423 v2(4282,3423)
VDD-3.3: C7.2 C8.2 C9.2 C10.2 C11.2 C12.2 C13.2 C14.2 C15.2 C16.2 C17.2 C18.2 C22.2 C23.1 C24.1 C29.1 C30.2 C31.1 C37.2 C38.1 C43.1 L1.1 P2.1 P3.1 P4.1 P5.1 R6.2 R10.2 R15.1 R17.1 R21.1 R24.1 R29.2 R40.2 U3.17 U3.30 U3.39 U3.52 U3.62 U3.72 U3.84 U3.95 U3.108 U3.121 U3.131 U3.143 U3.144 U5.8 U6.2 U7.23 U7.24 U8.1 U8.2 | length 22295
  Top Layer w9: R24.1 2568,2388 2597,2388 C22.2 ; 2590,2614 2650,2554 C22.2 ; U5.8@2715,2224.02 R21.1 2715,2338 2650,2403 C22.2
  Top Layer w10: 2621,1532 2654,1499 C24.1 2716,1364 P3.1 ; 2790,2566 2894,2566 L1.1 L1.1@2913,2533 ; 2834,1860 2836,1858 2874,1820 2989,1820 3001.15,1807.85 C18.2 3002.2,1777 v1(3052,1777) ; 2836,1946 2876,1906 2984,1906 3001.15,1888.85 C17.2 3066.55,1860.45 3169,1758 3608,1758 3632.05,1782.05 U3.84 ; 2836,2023 2868,1991 2974,1991 3001.15,1963.85 C16.2 3050.6,1895.51 U3.72 ; 2836,2096 2846,2096 ; 2836,2195 2872,2159 2962.15,2159 C15.2 3028.79,2092.36 U3.62 ; 2836,2266 2866,2236 2963.63,2236 C14.2 3087.48,2198.48 3178.21,2289.21 U3.52 ; 2836,2349 2858,2327 2957.14,2327 C13.2 3002.14,2282 v1(3041,2282) ; 2836,2519 2863,2492 2961.15,2492 C12.2 3009.15,2460 v1(3069,2460) ; v1(3163,1496) 3119,1496 C23.1 3116,1357.33 P2.1 ; v1(3275,2548) 3277.88,2545.12 U3.39 ; v1(3464,1564) 3464,1551 C29.1 3516,1350.67 P4.1 ; v1(3533,2582) 3533.62,2582.62 U3.30 ; U3.17 3789.53,2737 ; 3789.53,2717.53 3789.53,2774.53 3960,2945 C7.2 3966,2968 v1(4008,2968) ; U3.95 3848.58,1880.58 v1(3860,1892) ; v1(3851,1559) 3851,1544 C31.1 3896,1364 P5.1 ; v1(3985,2779) 3985,2898.4 C8.2 4074.6,2960 v1(4110,2960) ; v1(4098,2159) 4102,2159 4129.27,2131.73 U3.121 4406.12,2131.73 R10.2 ; v1(4098,2347) 4116.42,2328.58 U3.131 4262,2328.58 ; U3.108 4104.49,1858.49 4118,1872 4149,1872 v1(4159,1862) 4203,1818 4654,1818 4680,1792 R17.1 ; U3.143 4411.8,2564.8 v1(4414,2567) 4396.51,2584.49 U3.144 ; v1(4227,2786) 4261.8,2820.8 C9.2 4299,2974 v1(4313,2960) ; 4250.42,2328.58 4542.58,2328.58 R6.2 ; v1(4259,1598) 4309,1598 R29.2 ; v1(4362.4,2764) C10.2 4391,2974 v1(4412,2953) ; v1(4429,2720) 4463,2754 C11.2 4481,2974 4501,2994 v1(4501,3005) ; v1(4468,1584) 4486,1566 R40.2 4586,1632 R15.1
  Top Layer w12: U6.2@2840,2760 2840,2926 C30.2
  Top Layer w20: 2452.5,2751.5 2616.5,2751.5 2805,2940 C30.2 2903,2989 3071,2989 C43.1 3452,2940 3476.69,2915.31 ; U7.23@3476.69,2859.84 3476.69,2915.31 ; U7.24 3500,2892 3476.69,2915.31
  Top Layer w30: v2(2435,3074) 2435,3025 C38.1 ; v1(2621,1492) 2621,1532 2621,1557 2834,1770 2834,1860 ; U8.1 2720,3049 2674.94,3003.94 ; U8.2 2770,3032 2741.94,3003.94 2674.94,3003.94 ; 2836,1858 2836,1946 2836,2023 2836,2096 2836,2195 2836,2266 2836,2349 2836,2519 2836,2520 2790,2566 2742,2614 2590,2614 2452.5,2751.5 2419,2785 2419,2947 2452,2980 C38.1 ; C38.1 2576.06,2980 C37.2 2674.94,3003.94
  Bottom Layer w10: v1(3041,2282) 3373,2282 3533,2442 v1(3533,2582) ; v1(3052,1777) 3167,1892 v1(3860,1892) ; v1(3069,2460) 3157,2548 v1(3275,2548) ; 3127,1532 v1(3163,1496) ; 3432,1532 v1(3464,1564) ; 3971,3005 v1(4008,2968) ; v1(3985,2779) 3985,2460 v1(4098,2347) ; 4089,3005 4110,2984 v1(4110,2960) ; v1(4098,2159) 4159,2220 4159,2718 v1(4227,2786) ; v1(4259,1598) 4159,1698 4159,1825 ; 4269,3004 v1(4313,2960) v1@4313,2963 ; v1(4362.4,2764) 4362.4,2248.4 4159,2045 v1(4159,1862) 4159,1825 ; 4365,3005 4412,2958 v1(4412,2953) ; v1(4414,2567) 4414,2705 v1(4429,2720) ; 4426,3005 v1(4501,3005) ; v1(4468,1584) 4400,1584 4159,1825
  Bottom Layer w20: v1(2621,1492) 2672,1492 2712,1532 3127,1532 3432,1532 3608.57,1532 3610.57,1530 3635.43,1530 3637.43,1532 3824,1532 v1(3851,1559)
  Bottom Layer w30: v2(2435,3074) 2933,3074 3020,2987 3625,2987 3647,3009 3835.5,3009 3839.5,3005 3971,3005 4089,3005 4365,3005 4426,3005
VDDA: C19.2 L1.2 U3.32 U3.33 | length 704.5
  Top Layer w10: L1.2@3006,2543.32 C19.2 3031,2595 v1(3052,2595) ; U3.33 3474.57,2599.43 v1(3483,2591) 3494.25,2602.25 U3.32
  Bottom Layer w10: v1(3052,2595) 3056,2591 v1(3483,2591)
pads on no net: J1.0 J1.9 J1.16 J1.17 J1.21 J1.22 J1.23 J1.24 J1.25 U2.5 U3.1 U3.2 U3.3 U3.4 U3.5 U3.6 U3.7 U3.8 U3.9 U3.10 U3.11 U3.12 U3.13 U3.14 U3.15 U3.18 U3.19 U3.21 U3.22 U3.41 U3.46 U3.47 U3.49 U3.50 U3.53 U3.54 U3.55 U3.56 U3.57 U3.58 U3.59 U3.60 U3.63 U3.66 U3.67 U3.68 U3.69 U3.70 U3.73 U3.74 U3.75 U3.76 U3.77 U3.78 U3.79 U3.80 U3.81 U3.82 U3.93 U3.96 U3.97 U3.98 U3.99 U3.100 U3.101 U3.102 U3.103 U3.104 U3.110 U3.111 U3.112 U3.113 U3.116 U3.117 U3.118 U3.119 U3.122 U3.123 U3.124 U3.125 U3.126 U3.127 U3.128 U3.129 U3.132 U3.133 U3.134 U3.135 U3.136 U3.137 U3.140 U3.141 U3.142 U6.7 U6.8 U8.4

## Polygon pours and split planes (outlines as drawn)
GND on Top Layer "Top Layer-GND" (solid, remove dead copper, pour order 6): 1938,4221 1995,4164 5469,4164 5469,813 5453,797 5445,805 2012,805
GND on Bottom Layer "Top Layer-GND" (solid, remove dead copper, pour order 8): 1769,4218 6114,4218 6622,3710 5622,2710 5622,881 2269,881 1866,1284

## Keep-outs
Keep-Out Layer:
  the board outline again, w8

## Other copper
Top Layer:
  rectangle net GND: 2719.02,3177.17 2871,3251.97

## Silkscreen, mask and mechanical layers (free items; w line width, h text height)
Top Overlay:
  text "VCC" at 2556,3526 h40
  text "S" at 4849,3518 h40
  text "GND" at 2556,3441 h40
  text "GND" at 4814,3439 h40

## Dimensions
5019.69,3937.01 to 5019.69,1181.1 on Top Overlay
2362.2,1279.53 to 5118.11,1279.53 on Top Overlay